# Allegro board K3.brd
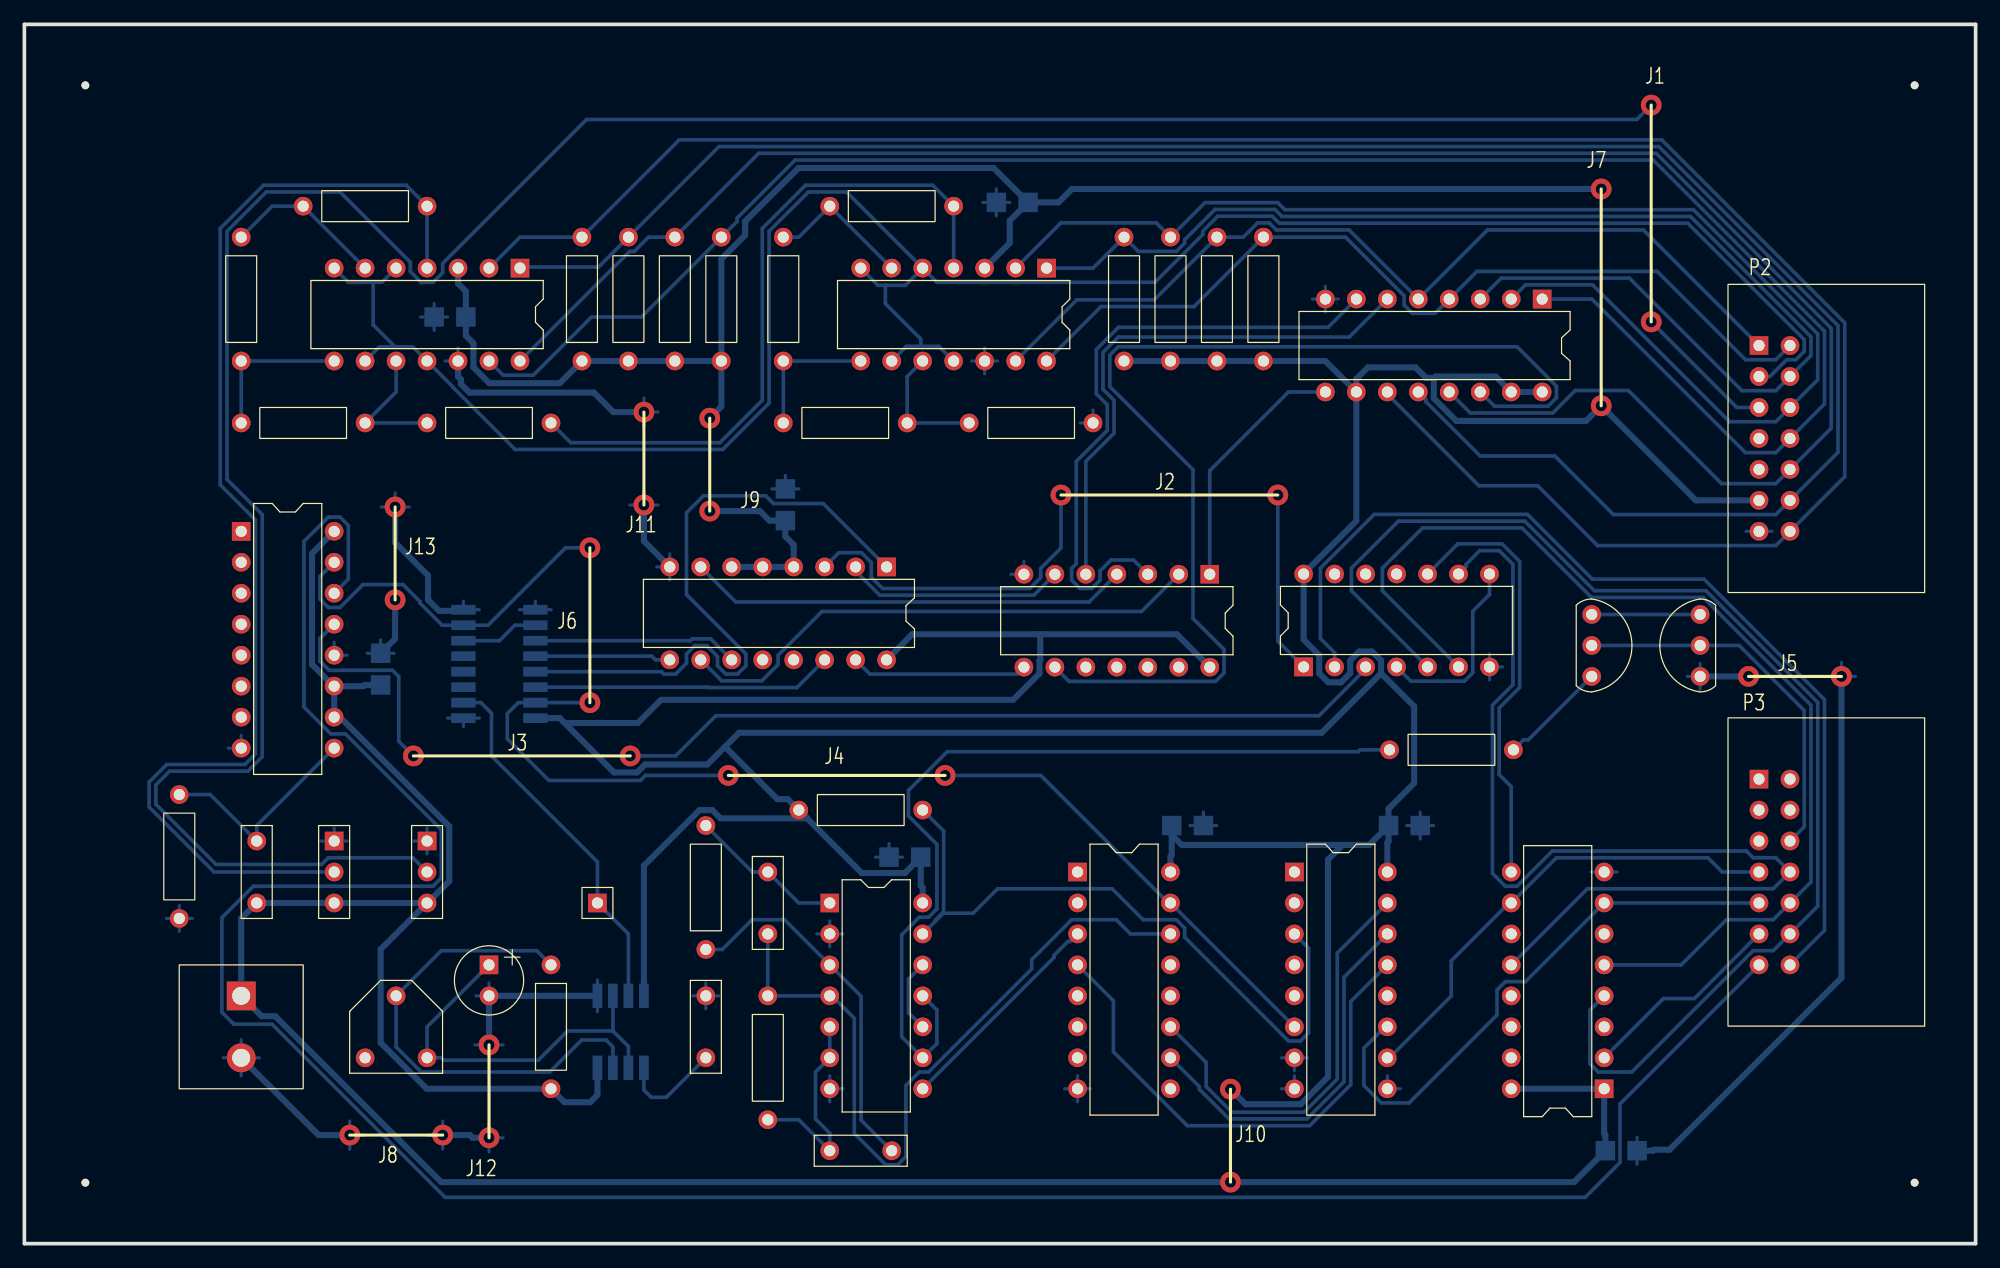
[diagram p0: board, top side]
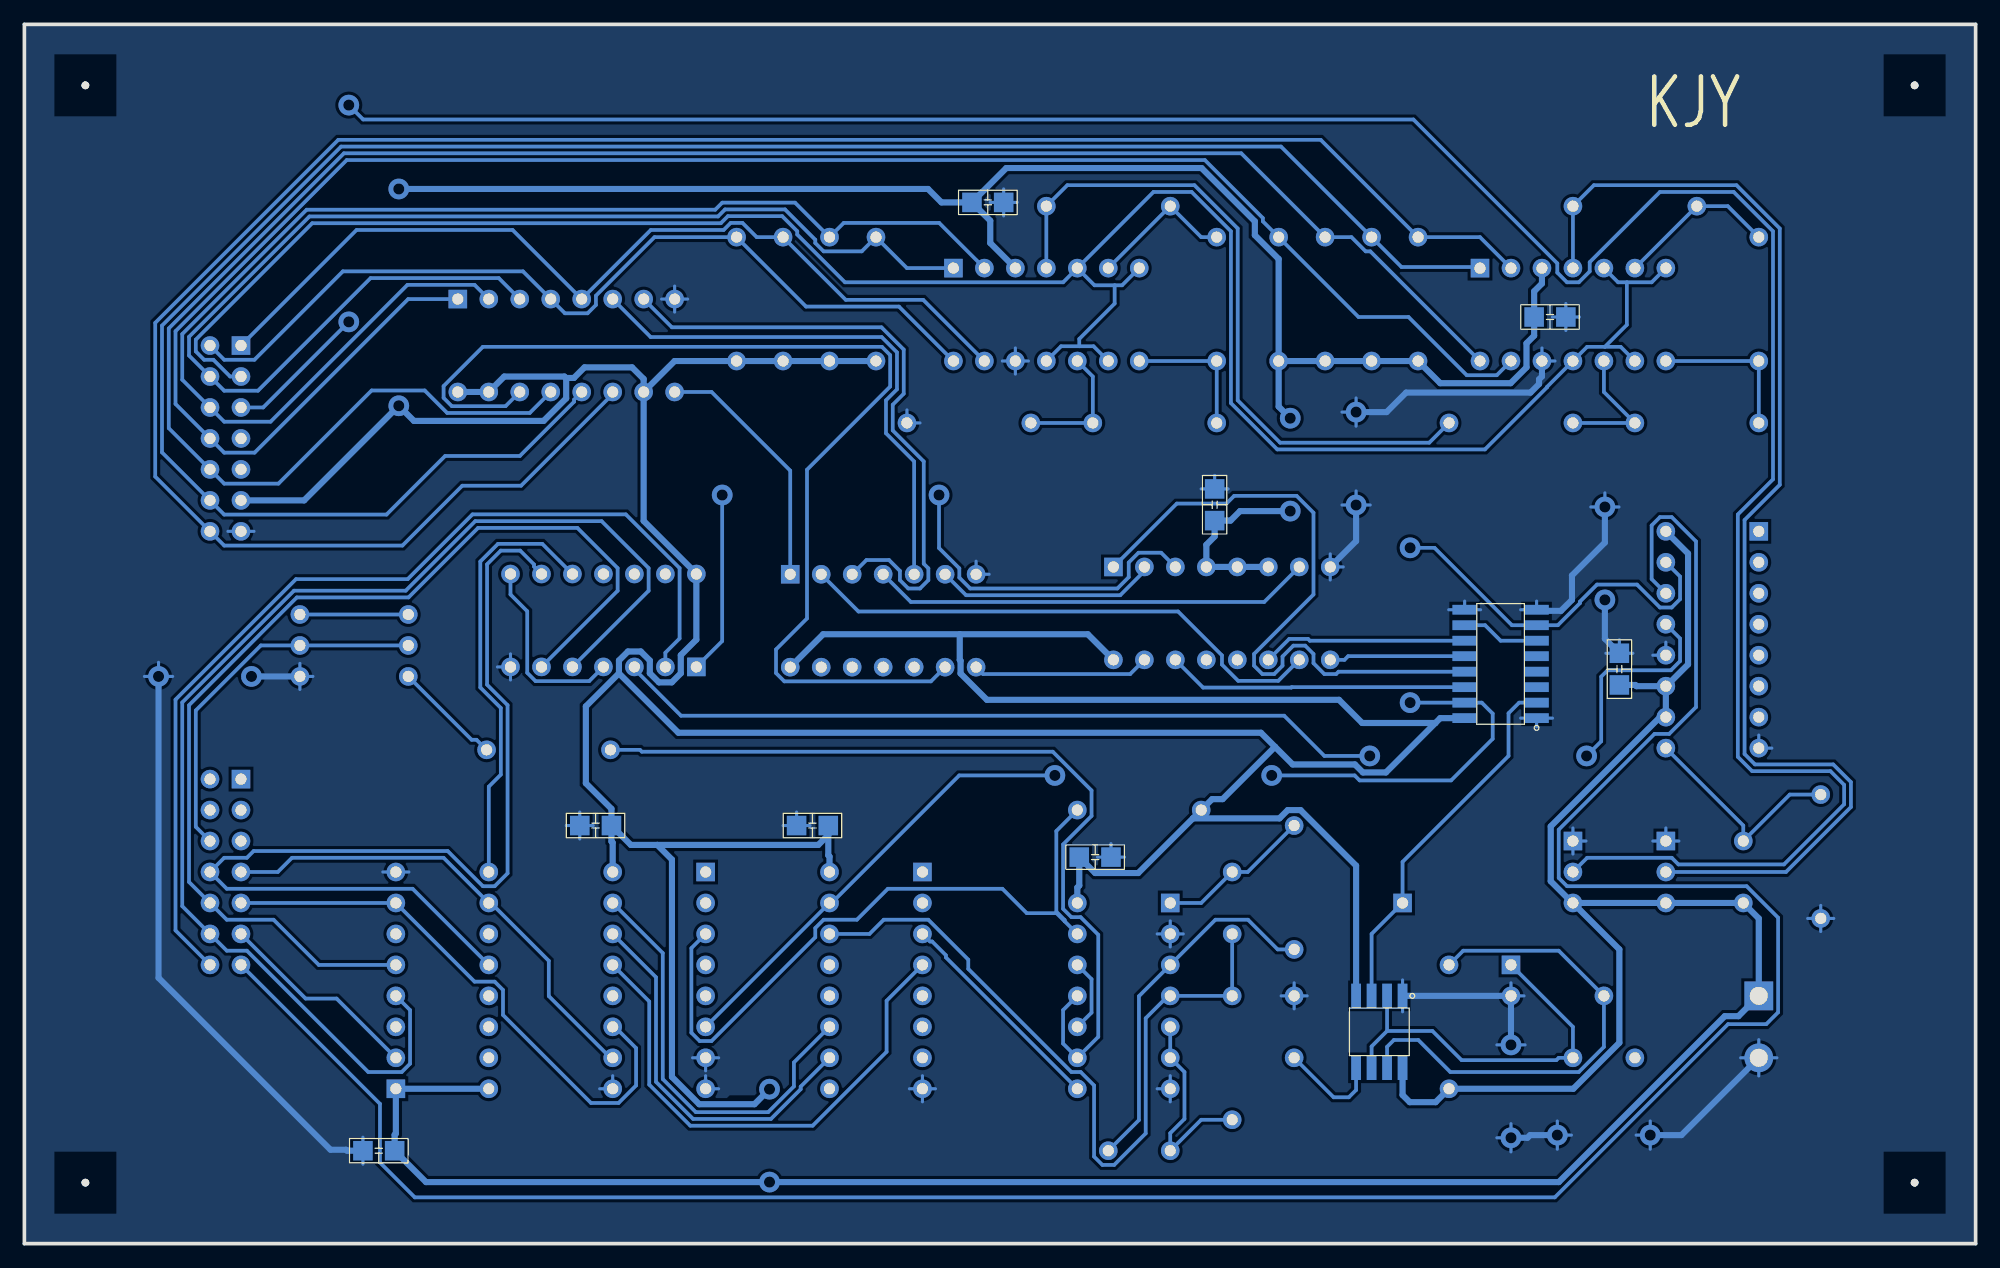
[diagram p1: board, bottom side, seen from below]

Outline 160 x 100 mm; copper layers: TOP, BOTTOM. Coordinates in mm from the lower left corner of the outline.
Outline path: 0,100 0,0 160,0 160,100 0,100

## Design rules (mm)
nets with their own width: min track width 0.5; nets +5V GND

## Placement (name value [footprint] x y rotation side)
C1  10uF  [CAP196]  38.1 22.86 0 top
C2  0.1uF  [CAP300]  55.88 15.24 90 top
C3  0.1uF  [CAP300]  19.05 27.94 90 top
C4  0.01uF  [CAP300]  60.96 30.48 270 top
C5  0.01uF  [CAP300]  71.12 7.62 180 top
C6  0.1uF  [SMDCAP]  36.3 76 180 bottom
C7  0.1uF  [SMDCAP]  82.4 85.4 180 bottom
C8  0.1uF  [SMDCAP]  62.4 59.2 90 bottom
C9  0.1uF  [SMDCAP]  111.76 34.29 0 bottom
C10  0.1uF  [SMDCAP]  93.98 34.29 0 bottom
C11  0.1uF  [SMDCAP]  29.21 45.72 90 bottom
C12  0.1uF  [SMDCAP]  129.54 7.62 0 bottom
C13  0.1uF  [SMDCAP]  73.6 31.7 180 bottom
J1  -  [JUMPER6]  133.4 75.6 270 bottom
J2  -  [JUMPER6]  85 61.4 180 bottom
J3  -  [JUMPER6]  31.9 40 180 bottom
J4  -  [JUMPER6]  75.5 38.4 0 bottom
J5  -  [JUMPER2]  141.38 46.52 180 bottom
J6  -  [JUMPER4]  46.37 44.37 270 bottom
J7  -  [JUMPER6]  129.3 86.5 90 bottom
J8  -  [JUMPER2]  34.3 8.9 0 bottom
J9  -  [JUMPER2]  56.2 67.7 90 bottom
J10  -  [JUMPER2]  98.9 5.05 270 bottom
J11  -  [JUMPER2]  50.8 68.2 90 bottom
J12  -  [JUMPER2]  38.1 16.3 90 bottom
J13  -  [JUMPER2]  30.4 52.8 270 bottom
NOREF  -  [unnamed]  155 5 0 top
NOREF#2  -  [#2]  0 0 0 top
NOREF#3  -  [#2]  0 0 90 top
NOREF#4  -  [unnamed]  5 5 0 top
NOREF#5  -  [unnamed]  5 95 0 top
NOREF#6  -  [unnamed]  155 95 0 top
P1  CON2  [POWER2]  17.78 20.32 270 top
P2  CON14  [JUMPER14]  142.24 73.66 270 top
P3  CON14  [JUMPER14]  142.24 38.1 270 top
Q1  2SC1815  [TO92]  128.52 51.6 270 top
Q2  2SC1815  [TO92]  137.41 46.52 90 top
R1  10K  [RES400]  43.18 12.7 0 top
R2  10K  [RES400]  33.02 85.09 90 top
R3  10K  [RES400]  17.78 82.55 180 top
R4  10K  [RES400]  17.78 67.31 270 top
R5  10K  [RES400]  33.02 67.31 270 top
R6  10K  [RES400]  76.2 85.09 90 top
R7  10K  [RES400]  62.23 82.55 180 top
R8  10K  [RES400]  62.23 67.31 270 top
R9  100  [RES400]  77.47 67.31 270 top
R10  4.7K  [RES400]  45.72 72.39 0 top
R11  4.7K  [RES400]  49.53 72.39 0 top
R12  4.7K  [RES400]  53.34 72.39 0 top
R13  4.7K  [RES400]  57.15 72.39 0 top
R14  4.7K  [RES400]  93.98 72.39 0 top
R15  4.7K  [RES400]  90.17 72.39 0 top
R16  4.7K  [RES400]  101.6 72.39 0 top
R17  4.7K  [RES400]  97.79 72.39 0 top
R18  680K  [RES400]  12.7 36.83 180 top
R19  10K  [RES400]  55.88 34.29 180 top
R20  10K  [RES400]  60.96 20.32 180 top
R21  10K  [RES400]  63.5 35.56 270 top
R22  1K  [RES400]  122.1 40.5 90 top
TP1  TP  [JUMPER1]  46.99 27.94 0 top
U1  NE555  [SOP8]  46.99 20.32 270 bottom
U2  LM339  [DIP14_3]  40.64 80.01 270 top
U3  LM339  [DIP14_3]  83.82 80.01 270 top
U4  40147  [DIP16_3]  124.46 77.47 270 top
U5  4069  [DIP14_3]  97.2 54.9 270 top
U6  4518  [SOP16]  36 43.1 0 bottom
U7  4585  [DIP16_3]  70.7 55.5 270 top
U8  4027  [DIP16_3]  17.78 58.42 0 top
U9  4071  [DIP14_3]  104.9 47.3 90 top
U10  4001  [DIP14_3]  66.04 27.94 0 top
U11  4017  [DIP16_3]  86.36 30.48 0 top
U12  4051  [DIP16_3]  104.14 30.48 0 top
U13  4175  [DIP16_3]  129.54 12.7 180 top
VR1  1M  [RESADJ]  33.02 15.24 270 top
VR2  10K  [JUMPER3]  25.4 33.02 270 top
VR3  10K  [JUMPER3]  33.02 33.02 270 top

## Library data of the parts
C1 = Cap Pol
C2-C5 = Cap NP: Tolerance: ***; User Part Number: ***
C6-C13 = Cap TEXT
J1-J13 = JUMPER
P1 = CON2
P2 P3 = CON14: User Part Number: ***
Q1 Q2 = 2SC1815
R1-R22 = resistor: Tolerance: ***; User Part Number: ***
TP1 = TP: User Part Number: ***
U1 = NE555
U2 U3 = LM339: Tolerance: ***; User Part Number: ***
U4 = 40147: Tolerance: ***; User Part Number: ***
U5 = 4069: Tolerance: ***; User Part Number: ***
U6 = 4518
U7 = 4585: Tolerance: ***; User Part Number: ***
U8 = 4027: Tolerance: ***; User Part Number: ***
U9 = 4071: Tolerance: ***; User Part Number: ***
U10 = 4001: Tolerance: ***; User Part Number: ***
U11 = 4017: Tolerance: ***; User Part Number: ***
U12 = 4051: Tolerance: ***; User Part Number: ***
U13 = 4175: Tolerance: ***; User Part Number: ***
VR1 = VR1: Tolerance: ***; User Part Number: ***
VR2 VR3 = VR2: User Part Number: ***

## Footprints (pads in the part's own frame, mm; a bottom-side part is the same pattern mirrored in y, then rotated)
CAP196
  rect 1.524x1.524 hole 0.914: 1(0,0)
  round 1.524 hole 0.914: 2(0,-2.54)
CAP300
  round 1.524 hole 0.914: 1(0,0) 2(5.08,0)
DIP14_3
  rect 1.524x1.524 hole 0.914: 1(0,0)
  round 1.524 hole 0.914: 2(0,-2.54) 3(0,-5.08) 4(0,-7.62) 5(0,-10.16) 6(0,-12.7) 7(0,-15.24) 8(7.62,-15.24) 9(7.62,-12.7) 10(7.62,-10.16) 11(7.62,-7.62) 12(7.62,-5.08) 13(7.62,-2.54) 14(7.62,0)
DIP16_3
  rect 1.524x1.524 hole 0.914: 1(0,0)
  round 1.524 hole 0.914: 2(0,-2.54) 3(0,-5.08) 4(0,-7.62) 5(0,-10.16) 6(0,-12.7) 7(0,-15.24) 8(0,-17.78) 9(7.62,-17.78) 10(7.62,-15.24) 11(7.62,-12.7) 12(7.62,-10.16) 13(7.62,-7.62) 14(7.62,-5.08) 15(7.62,-2.54) 16(7.62,0)
JUMPER1
  rect 1.524x1.524 hole 0.914: 1(0,0)
JUMPER3
  rect 1.524x1.524 hole 0.914: 1(0,0)
  round 1.524 hole 0.914: 2(2.54,0) 3(5.08,0)
JUMPER14
  rect 1.524x1.524 hole 0.914: 1(0,0)
  round 1.524 hole 0.914: 2(0,2.54) 3(2.54,0) 4(2.54,2.54) 5(5.08,0) 6(5.08,2.54) 7(7.62,0) 8(7.62,2.54) 9(10.16,0) 10(10.16,2.54) 11(12.7,0) 12(12.7,2.54) 13(15.24,0) 14(15.24,2.54)
POWER2
  rect 2.362x2.362 hole 1.473: 1(0,0)
  round 2.362 hole 1.473: 2(5.08,0)
RES400
  round 1.524 hole 0.914: 1(0,0) 2(0,10.16)
RESADJ
  round 1.524 hole 0.914: 1(0,0) 2(-5.08,-2.54) 3(0,-5.08)
SMDCAP
  rect 1.6x1.6 smd: 1(0.1,0) 2(2.7,0)
SOP8
  rect 2x0.8 smd: 1(0,0) 2(0,-1.27) 3(0,-2.54) 4(0,-3.81) 5(5.9,-3.81) 6(5.9,-2.54) 7(5.9,-1.27) 8(5.9,0)
SOP16
  rect 2x0.8 smd: 1(0,0) 2(0,-1.27) 3(0,-2.54) 4(0,-3.81) 5(0,-5.08) 6(0,-6.35) 7(0,-7.62) 8(0,-8.89) 9(5.9,-8.89) 10(5.9,-7.62) 11(5.9,-6.35) 12(5.9,-5.08) 13(5.9,-3.81) 14(5.9,-2.54) 15(5.9,-1.27) 16(5.9,0)
TO92
  round 1.524 hole 0.914: 1(0,0) 2(2.54,0) 3(5.08,0)
unnamed
  round 0.635 hole 3.175 unplated: (0,0)

## Nets
+5V: C3.1 C6.1 C7.1 C8.1 C9.1 C10.1 C11.1 C12.1 C13.1 P1.1 P2.11 R1.1 R10.1 R11.1 R12.1 R13.1 R14.1 R15.1 R16.1 R17.1 R21.1 U1.4(RST) U1.8(VCC) U2.3 U3.3 U4.10(I\9\) U4.15(I\0\) U4.16(VCC) U5.14 U6.16 U7.4(A>BIN) U7.5(A<BIN) U7.6(A=BIN) U7.16(VCC) U8.10(J) U8.11(K) U8.16 U9.14 U10.14 U11.16(VCC) U12.16(VCC) U13.1(R\S\T\) U13.16(VCC) VR2.3(A) VR3.3(A)
GND: C1.2 C2.2 C6.2 C7.2 C8.2 C9.2 C10.2 C11.2 C12.2 C13.2 P1.2 P2.13 Q2.1(B) R9.2 R18.2 U1.1(GND) U2.12 U3.12 U4.8(GND) U5.7 U6.1(CLK) U6.8 U6.9(CLK) U7.8(GND) U8.8 U8.12(RST) U9.7 U10.2(I1) U10.7 U11.8(GND) U12.7(VEE) U12.8(GND) U12.9(C) U13.8(GND) VR2.1(WIPER) VR3.1(WIPER)
AD0: P2.14 R10.2 U2.2(OUT) U4.11(I\1\)
AD1: P2.12 R11.2 U2.1(OUT) U4.12(I\2\)
AD2: P2.10 R12.2 U2.14(OUT) U4.13(I\3\)
AD3: P2.8 R13.2 U2.13(OUT) U4.1(I\4\)
AD4: P2.6 R14.2 U3.2(OUT) U4.2(I\5\)
AD5: P2.4 R15.2 U3.1(OUT) U4.3(I\6\)
AD6: P2.2 R16.2 U3.14(OUT) U4.4(I\7\)
AD7: P2.1 R17.2 U3.13(OUT) U4.5(I\8\)
CLK: TP1.1 U1.3(OUT) U6.2(EN)
MOTOR-GND: P3.6 Q1.2(C) Q2.2(C)
MR: U6.7(CLR) U6.15(CLR) U8.15(Q) U11.15(RST) U12.6(E\N\)
MR2: P3.13 U8.14(Q\)
SW1: P3.14 U9.2(I1)
SW2: P3.12 U9.5(I0) U13.4(D0)
SW3: P3.10 U9.6(I1) U13.5(D1)
SW4: P3.8 U9.9(I1) U13.12(D2)
SWLED1: P3.11 U13.2(Q0)
SWLED2: P3.9 U12.11(A) U13.7(Q1)
SWLED3: P3.7 U12.10(B) U13.10(Q2)
VR3: P2.5 VR3.2(B)
VR-LED: P2.3 U2.5(+IN) U2.7(+IN) U2.9(+IN) U2.11(+IN) U3.5(+IN) U3.7(+IN) U3.9(+IN) U3.11(+IN)
N01960: R2.2 R3.1 U2.6(-IN)
N01964: R2.1 U2.4(-IN) VR2.2(B)
N02001: R3.2 R4.1 U2.8(-IN)
N02088: R4.2 R5.1 U2.10(-IN)
N02162: R5.2 R6.1 U3.4(-IN)
N02236: R6.2 R7.1 U3.6(-IN)
N02310: R7.2 R8.1 U3.8(-IN)
N02384: R8.2 R9.1 U3.10(-IN)
N03342: U4.9(A\) U5.1(I)
N03346: U4.7(B\) U5.3(I)
N03353: U4.6(C\) U5.5(I)
N03365: U4.14(D\) U5.9(I)
N03377: U5.8(O) U7.15(A3)
N03391: U5.6(O) U7.2(A2)
N03403: U5.4(O) U7.7(A1)
N03415: U5.2(O) U7.10(A0)
N03439: U6.11(Q0) U7.11(B0)
N03441: U6.12(Q1) U7.9(B1)
N03443: U6.13(Q2) U7.1(B2)
N03445: U6.14(Q3) U7.14(B3)
N03459: U6.6(Q3) U6.10(EN)
N03623: R1.2 U1.7(DISC) VR1.2
N03677: C1.1 U1.2(TRIG) U1.6(THR) VR1.1
N03742: C2.1 U1.5(CV)
N03797: U7.3(A=BOUT) U9.1(I0)
N03822: U8.13(CLK) U9.3(O)
N03853: C3.2 R18.1 U8.9(SET)
N08438: C4.1 R19.1 U10.1(I0)
N08457: C4.2 R20.1 U10.4(O) U11.14(CLK)
N08473: C5.2 R20.2 U10.5(I0) U10.6(I1)
N08528: C5.1 R19.2 U10.3(O)
N08724: U11.11(9) U12.15(X2)
N08757: U11.10(4) U12.14(X1)
N08772: U11.4(2) U12.13(X0)
N08784: U10.8(I0) U11.3(0)
N08808: R21.2 U10.13(I1) U12.3(X)
N08837: U9.4(O) U9.8(I0)
N08841: U9.10(O) U13.9(CLK)
N09092: U10.10(O) U10.12(I0)
N09117: R22.2 U10.9(I1) U10.11(O)
N09203: Q1.3(E) R22.1
N09219: Q1.1(B) Q2.3(E)

Pads without a net: P2 7 9; P3 1 2 3 4 5; U5 10 11 12 13; U6 3 4 5; U7 12 13; U8 1 2 3 4 5 6 7; U9 11 12 13; U11 1 2 5 6 7 9 12 13; U12 1 2 4 5 12; U13 3 6 11 13 14 15; VR1 3

## Via types
v1: diameter 1.7, hole 0.91, TOP to BOTTOM, 26 vias

## Routing (per net, layer and track width the routed paths; a pad name or vN(x,y) marks a point on that pad's centre or on a via; arc(x,y) is an arc through that point)
+5V: length 746.2
  BOTTOM w0.5: U5.14 94.5,49.98 83.3,49.98 ; 57.45,40.75 58.6,41.9 106.37,41.9 111.25,46.77 ; 57.45,40.75 61.74,36.46 62.6,36.46 R21.1 64.18,34.88 ; 57.45,40.75 56,39.3 50.9,39.3 50.24,38.65 48.35,38.65 44.3,42.7 ; R13.1 57.15,80.76 59.1,82.71 59.1,83.85 63.47,88.22 79.48,88.22 C7.1 ; R13.1 57.15,68.65 v1(56.2,67.7) ; R13.1 R12.1 R11.1 R10.1 43.9,70.57 38.13,70.57 36.83,71.87 36.83,73.84 36.2,74.47 C6.1 36.2,78.1 35.56,78.74 U2.3 ; U8.16 23.58,56.6 23.58,47.51 25.37,45.72 U8.11 ; U4.10 106.68,72.39 R16.1 R17.1 R14.1 R15.1 ; U4.10 109.22,70.92 110.17,71.87 114.07,71.87 114.94,71 115.6,71 ; U4.10 109.22,59.27 104.9,54.95 U9.14 104.9,49.54 106.17,48.26 106.17,46.77 106.92,46.03 107.97,46.03 108.71,46.78 108.71,47.83 109.45,48.57 110.5,48.57 111.25,47.83 111.25,46.77 ; U12.16 111.76,32.89 111.86,32.99 C9.1 ; U1.4 50.8,31 55.35,35.56 56.41,35.56 57.08,34.88 64.18,34.88 ; C7.1 80.8,83.9 80.8,82.07 U3.3 ; C7.1 84.8,85.4 85.9,86.5 v1(129.3,86.5) ; 115.6,71 115.57,70.97 115.57,69.33 117.42,67.48 128.06,67.48 v1(129.3,68.72) 137.06,60.96 P2.11 ; 115.6,71 115.72,71.12 120.65,71.12 U4.15 U4.16 ; 94.08,33.52 94.08,31.85 93.98,31.75 U11.16 ; 94.08,33.52 C10.1 ; 94.08,33.52 94.9,32.7 108.1,32.7 ; U7.16 72.8,49.98 83.3,49.98 ; 111.25,46.77 113.96,44.06 113.96,37.76 111.86,35.66 C9.1 ; 44.3,42.7 50.3,42.7 52.2,44.6 81.07,44.6 83.23,46.76 83.23,47.8 83.3,47.87 83.3,49.98 ; 44.3,42.7 43.9,43.1 U6.16 ; VR3.3 33.05,27.94 34.84,29.73 34.84,34.22 25.88,43.18 U8.10 U8.11 ; VR3.3 29.21,24.13 29.21,16.47 32.99,12.7 R1.1 44.28,11.6 46.4,11.6 46.99,12.19 U1.8 ; VR3.3 VR2.3 C3.1 17.78,26.67 P1.1 19.45,18.65 20.57,18.65 34.18,5.05 v1(98.9,5.05) 127.07,5.05 C12.1 129.64,8.92 129.54,9.02 U13.1 U13.16 ; 64.18,34.88 68.66,30.4 72.2,30.4 C13.1 73.5,29.37 73.66,29.21 U10.14 ; U8.11 27.81,45.72 27.91,45.82 C11.1 ; 108.1,32.7 106.9,31.5 106.9,13.67 104.67,11.43 100.13,11.43 v1(98.9,12.67) ; 108.1,32.7 110.27,32.7 C9.1 ; U7.6 U7.5 U7.4 63.08,57.32 62.4,58 C8.1 61.1,59.3 60.32,60.08 v1(56.2,60.08)
GND: length 263.9
  BOTTOM w0.254: v1(34.3,8.9) 34.3,10.06 ; v1(34.3,8.9) 34.3,7.74 ; v1(34.3,8.9) 33.14,8.9 ; C11.2 30.32,48.42 ; C11.2 29.21,49.53 ; C11.2 28.1,48.42 ; 79.7,84.29 C7.2 ; C7.2 80.81,85.4 ; C7.2 78.59,85.4 ; C7.2 79.7,86.51 ; C10.2 97.79,34.29 ; C10.2 95.57,34.29 ; C10.2 96.68,35.4 ; U6.8 37.31,51.99 ; U6.8 34.69,51.99 ; U6.8 36,52.7 ; 52.92,54.43 U7.8 ; U7.8 52.92,56.57 ; U7.8 51.85,55.5 ; v1(50.8,68.2) 50.8,69.36 ; v1(50.8,68.2) 51.96,68.2 ; v1(50.8,68.2) 50.8,67.04 ; U3.12 78.74,73.46 ; U3.12 79.81,72.39 ; U3.12 78.74,71.32 ; U3.12 77.67,72.39 ; C13.2 72.01,31.7 ; C13.2 69.79,31.7 ; C13.2 70.9,32.81 ; C6.2 34.71,76 ; C6.2 33.6,74.89 ; C6.2 32.49,76 ; C6.2 33.6,77.11 ; 35.56,73.46 U2.12 34.49,72.39 ; 61.29,61.9 C8.2 ; C8.2 63.51,61.9 ; C8.2 62.4,63.01 ; C9.2 114.46,35.4 ; C9.2 113.35,34.29 ; C9.2 115.57,34.29 ; C9.2 114.46,33.18 ; U10.2 67.11,25.4 ; U10.2 66.04,24.33 ; U10.2 64.97,25.4 ; U10.2 66.04,26.47 ; 49.64,60.58 v1(50.8,60.58) ; v1(50.8,60.58) 50.8,61.74 ; v1(50.8,60.58) 51.96,60.58 ; 55.88,19.25 C2.2 ; C2.2 54.81,20.32 ; C2.2 55.88,21.39 ; C2.2 56.95,20.32 ; 37.03,20.32 C1.2 38.1,21.39 ; 31.95,33.02 VR3.1 ; VR3.1 33.02,34.09 ; VR3.1 33.02,31.95 ; v1(26.68,8.9) 26.68,10.06 ; v1(26.68,8.9) 27.84,8.9 ; v1(26.68,8.9) 26.68,7.74 ; v1(149,46.52) 150.16,46.52 ; v1(149,46.52) 149,47.68 ; v1(149,46.52) 147.84,46.52 ; 137.41,45.45 Q2.1 ; Q2.1 137.41,47.59 ; Q2.1 136.34,46.52 ; 38.1,7.52 v1(38.1,8.68) ; v1(38.1,8.68) 38.1,9.84 ; v1(38.1,8.68) 39.26,8.68 ; 104.14,13.77 U12.8 103.07,12.7 ; 87.63,68.38 R9.2 86.56,67.31 ; 16.71,40.64 U8.8 17.78,41.71 ; 24.33,33.02 VR2.1 ; VR2.1 26.47,33.02 ; VR2.1 25.4,34.09 ; 36.94,16.3 v1(38.1,16.3) 39.26,16.3 ; U4.8 107.75,77.47 ; U4.8 106.68,76.4 ; U4.8 106.68,78.54 ; U4.8 105.61,77.47 ; 25.4,49.33 U8.12 26.47,48.26 ; R18.2 13.77,26.67 ; R18.2 12.7,25.6 ; R18.2 11.63,26.67 ; R18.2 12.7,27.74 ; 120.14,46.23 U9.7 ; U9.7 121.21,47.3 ; U9.7 120.14,48.37 ; 132.24,8.73 C12.2 132.24,6.51 ; 36,42.39 U6.1 ; U6.1 34.69,43.1 ; U6.1 37.31,43.1 ; 128.47,30.48 U13.8 130.61,30.48 ; 111.76,13.77 U12.9 112.83,12.7 ; 46.99,19.01 U1.1 46.99,21.63 ; 86.36,11.63 U11.8 ; U11.8 87.43,12.7 ; U11.8 86.36,13.77 ; U11.8 85.29,12.7 ; 29.24,60.42 v1(30.4,60.42) ; v1(30.4,60.42) 30.4,61.58 ; v1(30.4,60.42) 31.56,60.42 ; 40.59,51.99 U6.9 ; U6.9 43.21,51.99 ; U6.9 41.9,52.7 ; P1.2 17.78,16.73 ; P1.2 16.29,15.24 ; P1.2 19.27,15.24 ; P1.2 17.78,13.75 ; 81.96,55.97 U5.7 80.89,54.9 ; 66.04,11.63 U10.7 ; U10.7 67.11,12.7 ; U10.7 66.04,13.77 ; 141.17,58.42 P2.13 143.31,58.42 ; U12.7 105.21,15.24 ; U12.7 103.07,15.24 ; U12.7 104.14,14.17
  BOTTOM w0.5: P1.2 24.12,8.9 v1(26.68,8.9) ; U1.1 C1.2 v1(38.1,16.3) ; v1(30.4,60.42) 30.4,57.5 33.1,54.8 33.1,52.8 34,51.9 35.91,51.9 U6.8 ; v1(50.8,68.2) 48.3,68.2 46.7,69.8 36.5,69.8 35.8,70.5 35.8,70.88 35.56,71.12 U2.12 ; v1(34.3,8.9) 36.53,8.9 36.75,8.68 v1(38.1,8.68) ; U7.8 50.8,57.62 v1(50.8,60.58) ; C11.2 30.4,49.61 v1(30.4,52.8) ; v1(141.38,46.52) Q2.1 ; C12.2 133.54,7.62 133.62,7.7 134.9,7.7 149,21.8 v1(149,46.52)
AD0: length 179.5
  BOTTOM w0.3: U4.11 111.76,69.67 119.27,62.16 124.09,62.16 129,57.25 143.61,57.25 P2.14 149.27,62.91 149.27,75.52 134.26,90.53 53.7,90.53 R10.2 40.64,82.55 U2.2
AD1: length 169.5
  BOTTOM w0.3: U2.1 40.73,80.1 47.08,80.1 R11.2 56.96,89.98 134.03,89.98 148.72,75.29 148.72,64.9 P2.12 143.61,59.79 130.31,59.79 125.5,64.6 119.37,64.6 114.92,69.05 114.92,69.23 U4.12
AD2: length 166.6
  BOTTOM w0.3: U4.13 118.56,68.13 125.33,68.13 127.17,69.97 131.53,69.97 139.17,62.33 143.61,62.33 P2.10 148.16,66.88 148.16,75.06 133.8,89.43 60.22,89.43 R12.2 51.18,82.55 50.01,81.38 49.63,81.38 U2.14
AD3: length 159.3
  BOTTOM w0.3: U2.13 39.27,71.22 41.72,71.22 46.5,76 50.6,76 R13.2 58.45,83.85 58.45,84.12 63.2,88.87 133.57,88.87 147.61,74.83 147.61,68.87 P2.8 143.61,64.87 141.13,64.87 128.53,77.47 U4.1
AD4: length 108.9
  BOTTOM w0.3: U4.2 123.09,78.64 128.59,78.64 139.81,67.41 143.61,67.41 P2.6 147.05,70.85 147.05,74.6 136.86,84.8 103.35,84.8 102.77,85.38 96.81,85.38 R14.2 92.81,83.72 84.99,83.72 U3.2
AD5: length 104.5
  BOTTOM w0.3: U3.1 87.63,80.01 R15.2 91.34,81.38 94.46,81.38 95.15,82.07 95.15,82.34 97.63,84.82 102.54,84.82 103.12,84.25 136.63,84.25 146.5,74.37 146.5,72.84 P2.4 143.61,69.95 140.85,69.95 131.61,79.19 121.1,79.19 U4.3
AD6: length 73.1
  BOTTOM w0.3: P2.2 143.61,72.49 141.13,72.49 133.88,79.74 119.11,79.74 U4.4 115.67,76.3 113.82,76.3 113.13,76.99 113.13,77.75 108.33,82.55 R16.2 95.9,76.85 88.28,76.85 U3.14
AD7: length 74.5
  BOTTOM w0.3: U3.13 86.3,77.41 92.65,77.41 R17.2 99.95,82.55 101.12,83.72 102.08,83.72 102.66,83.14 108.63,83.14 U4.5 119.97,83.14 132.76,83.14 P2.1
CLK: length 30.5
  BOTTOM w0.3: U1.3 49.53,25.4 TP1.1 46.99,31.31 38.3,40 38.3,43.5 37.43,44.37 U6.2
MOTOR-GND: length 30.8
  BOTTOM w0.3: Q1.2 Q2.2 140.61,49.06 145.95,43.73 145.95,34.19 P3.6
MR: length 96.9
  BOTTOM w0.3: U8.15 24.23,54.71 24.23,52.86 24.92,52.17 25.88,52.17 27.76,54.05 31.05,54.05 32.45,52.65 32.45,52.53 34.26,50.72 U6.7 38.02,50.72 44.37,57.07 v1(46.37,57.07) ; v1(46.37,44.37) U6.15 40.5,44.37 39.6,43.47 39.6,41.4 43.01,37.99 50.51,37.99 50.92,38.4 v1(57.72,38.4) ; U12.6 U11.15 93.8,27.94 83.34,38.4 v1(75.5,38.4)
MR2: length 213.9
  BOTTOM w0.3: P3.13 130.84,11.46 130.84,6.65 127.98,3.79 34.51,3.79 20.3,18 17.17,18 16.2,18.97 16.2,26.73 18.77,29.31 33.5,29.31 34.19,30 34.19,33.95 26.33,41.81 25.12,41.81 22.93,44.01 22.93,57.59 24.92,59.59 25.88,59.59 26.57,58.9 26.57,54.51 U8.14
SW1: length 81
  BOTTOM w0.3: U9.2 107.44,48.47 106.27,49.63 106.27,55.4 110.68,59.81 123.26,59.81 128.57,54.5 137.73,54.5 147.61,44.62 147.61,25.69 P3.14
SW2: length 104
  BOTTOM w0.3: U9.5 108.81,53.55 108.81,55.4 112.67,59.26 123.03,59.26 128.73,53.55 137.89,53.55 147.05,44.39 147.05,27.67 P3.12 143.41,24.03 141.76,24.03 131.8,14.07 129.06,14.07 128.37,14.76 128.37,19.15 U13.4
SW3: length 87.5
  BOTTOM w0.3: U9.6 111.35,53.55 111.35,55.4 114.65,58.7 122.8,58.7 128.5,53 137.66,53 146.5,44.16 146.5,29.66 P3.10 143.41,26.57 139.57,26.57 135.86,22.86 U13.5
SW4: length 84.6
  BOTTOM w0.3: U9.9 118.21,55.53 118.21,55.71 119.34,56.84 120.94,56.84 122.06,55.72 122.06,45.84 120.38,44.16 120.38,30.37 121.44,29.31 122.4,29.31 125.29,32.2 141.2,32.2 141.75,31.65 143.61,31.65 P3.8 143.41,29.11 128.17,29.11 U13.12
SWLED1: length 16.9
  BOTTOM w0.3: P3.11 136.94,20.1 134.4,20.1 U13.2
SWLED2: length 46.7
  BOTTOM w0.3: P3.9 U13.7 123.09,21.49 121.44,21.49 120.75,20.8 120.75,18.75 113.53,11.53 111.28,11.53 109.84,12.97 109.84,16.04 111.58,17.78 U12.11
SWLED3: length 39.5
  BOTTOM w0.3: P3.7 139.22,30.48 138.05,31.65 125.63,31.65 U13.10 121.74,27.94 117,23.2 117,20.3 111.94,15.24 U12.10
VR3: length 220.4
  BOTTOM w0.3: VR3.2 31.85,31.65 24.92,31.65 24.37,31.1 15.71,31.1 10.78,36.03 10.78,37.63 11.9,38.75 18.32,38.75 19.5,39.93 19.5,59.8 16.61,62.69 16.61,83.03 19.84,86.26 25.88,86.26 31.65,80.49 31.65,79.73 32.54,78.84 33.5,78.84 34.3,79.64 34.3,80.4 46.1,92.2 132.22,92.2 v1(133.4,93.38) ; v1(133.4,75.6) 140.42,68.58 P2.5
VR-LED: length 184.8
  BOTTOM w0.3: U3.5 67.41,86.26 64.29,86.26 61.06,83.03 61.06,68.94 57.26,65.14 40.24,65.14 35.15,70.23 35.15,70.27 U2.11 31.85,73.56 30.4,73.56 ; U3.5 74.83,78.84 92.71,78.84 96.62,82.76 96.62,83.03 97.86,84.27 102.31,84.27 102.89,83.69 136.4,83.69 145.95,74.14 145.95,73.18 145.26,72.49 144.5,72.49 143.13,71.12 P2.3 ; U3.5 72.25,78.6 70.6,78.6 ; 28.6,78.84 28.6,75.36 30.4,73.56 ; 28.6,78.84 26.57,78.84 U2.7 ; 28.6,78.84 29.31,78.84 U2.5 ; 70.6,78.6 69.99,78.6 U3.7 ; 70.6,78.6 70.6,77.1 73.5,74.2 73.5,73.6 ; 73.5,73.6 72.33,73.6 U3.9 ; 73.5,73.6 74.99,73.6 U3.11 ; 30.4,73.56 29.11,73.56 U2.9
N01960: length 13.3
  BOTTOM w0.3: R3.1 20.32,85.09 R2.2 U2.6
N01964: length 97.6
  BOTTOM w0.3: VR2.2 15.55,30.48 10.23,35.8 10.23,37.86 11.67,39.3 18.09,39.3 18.95,40.16 18.95,59.35 16.06,62.24 16.06,83.26 19.61,86.81 31.3,86.81 R2.1 U2.4
N02001: length 12.7
  BOTTOM w0.3: U2.8 R3.2 R4.1
N02088: length 11.2
  BOTTOM w0.3: U2.10 30.48,69.85 R4.2 R5.1
N02162: length 56.5
  BOTTOM w0.3: U3.4 R6.1 74.48,86.81 64.06,86.81 60.51,83.26 60.51,69.17 57.03,65.69 44.8,65.69 R5.2
N02236: length 12
  BOTTOM w0.3: R7.1 63.5,82.55 R6.2 U3.6
N02310: length 11.4
  BOTTOM w0.3: R8.1 R7.2 U3.8
N02384: length 10.7
  BOTTOM w0.3: R9.1 R8.2 72.39,71.12 U3.10
N03342: length 20.7
  BOTTOM w0.3: U5.1 97.2,63.4 103.65,69.85 U4.9
N03346: length 52
  BOTTOM w0.3: U5.3 90.95,56.07 89.1,56.07 88.21,55.17 88.21,54.42 87.52,53.73 86.56,53.73 85.87,54.42 85.87,55.38 86.25,55.76 86.25,64.15 88.8,66.7 88.8,68.8 87.9,69.7 87.9,73.33 89.72,75.15 106.9,75.15 U4.7
N03353: length 44.7
  BOTTOM w0.3: U5.5 87.04,64.16 89.35,66.47 89.35,69.17 88.45,70.07 88.45,73.1 89.7,74.35 108.64,74.35 U4.6
N03365: length 90.8
  BOTTOM w0.3: U5.9 85.67,46.11 97.68,46.11 98.37,46.8 98.37,48.73 95.83,51.27 95.83,63.47 89,70.3 89,72.87 89.69,73.56 122.4,73.56 125.63,70.33 125.63,69.37 124.94,68.68 120.55,68.68 U4.14
N03377: length 14.5
  BOTTOM w0.3: U7.15 69.33,46.71 81.39,46.71 U5.8
N03391: length 18.2
  BOTTOM w0.3: U7.2 68.16,55.16 70.14,53.18 82.78,53.18 U5.6
N03403: length 36.3
  BOTTOM w0.3: U7.7 58.33,52.63 87.31,52.63 U5.4
N03415: length 44
  BOTTOM w0.3: U7.10 57.18,46.16 60.47,46.16 61.8,47.49 61.8,48.25 65.4,51.85 91.61,51.85 U5.2
N03439: length 16.9
  BOTTOM w0.3: U7.11 56.28,49.6 54.75,49.6 54.6,49.45 U6.11
N03441: length 11.1
  BOTTOM w0.3: U7.9 51.75,47.88 51.45,48.18 U6.12
N03443: length 54.4
  BOTTOM w0.3: U7.1 65.5,60.7 61.43,60.7 60.79,61.33 55.68,61.33 54.29,59.95 54.29,53.24 59.17,48.36 59.17,47.4 58.48,46.71 57.52,46.71 56.83,47.4 56.83,48.16 55.94,49.05 54.98,49.05 54.29,48.36 54.29,47.6 53.4,46.71 52.44,46.71 52.24,46.91 U6.13
N03445: length 24.7
  BOTTOM w0.3: U6.14 56.08,45.64 56.11,45.61 63.35,45.61 U7.14
N03459: length 6.4
  BOTTOM w0.3: U6.6 38.95,49.45 40.22,50.72 U6.10
N03623: length 40.6
  BOTTOM w0.3: R1.2 42.01,24.03 34.19,24.03 VR1.2 30.48,16.13 32.54,14.07 43.07,14.07 45.7,16.7 47.7,16.7 48.26,16.14 U1.7
N03677: length 32.5
  BOTTOM w0.3: U1.6 49.53,16.17 48.26,17.44 ; U1.2 48.26,17.44 ; 48.26,17.44 44.54,17.44 42.15,15.05 34.38,15.05 34.19,15.24 VR1.1 33.02,17.78 C1.1
N03742: length 8.5
  BOTTOM w0.3: C2.1 52.64,12 51.4,12 50.8,12.6 U1.5
N03797: length 42.9
  BOTTOM w0.3: v1(85,61.4) 85,57.05 83.33,55.38 83.33,54.62 82.44,53.73 70.37,53.73 69.45,54.66 69.45,55.86 68.64,56.67 66.79,56.67 U7.3 ; U9.1 102.78,49.42 v1(102.78,61.4)
N03822: length 80.9
  BOTTOM w0.3: U9.3 109.98,47.12 106.16,43.3 56.7,43.3 53.4,40 v1(49.68,40) ; U8.13 24.23,49.63 24.23,47.78 24.99,47.02 30.18,47.02 30.7,46.5 30.7,41.2 v1(31.9,40)
N03853: length 18.2
  BOTTOM w0.3: R18.1 15.24,36.83 C3.2 19.05,34.29 U8.9
N08438: length 12.8
  BOTTOM w0.3: U10.1 63.5,27.94 C4.1 59.69,30.48 R19.1
N08457: length 62.1
  BOTTOM w0.3: U11.14 90.7,25.4 89.53,26.57 85.88,26.57 82.6,23.29 82.6,22.53 74.14,14.07 73.39,14.07 72.29,12.97 72.29,7.14 71.6,6.45 70.64,6.45 68.05,9.04 68.05,18.48 66.22,20.32 U10.4 R20.1 C4.2
N08473: length 17.3
  BOTTOM w0.3: U10.5 U10.6 64.87,14.07 64.87,10.23 66.04,9.06 C5.2 63.5,10.16 R20.2
N08528: length 30
  BOTTOM w0.3: R19.2 57.23,24.13 59.67,26.57 62.33,26.57 U10.3 68.61,20.29 68.61,10.13 C5.1
N08724: length 35
  BOTTOM w0.3: U11.11 96.9,14.86 96.9,12.89 99.01,10.78 104.94,10.78 107.65,13.5 107.65,23.83 U12.15
N08757: length 31.3
  BOTTOM w0.3: U11.10 96.35,12.87 96.35,12.66 98.78,10.23 105.17,10.23 108.21,13.27 108.21,21.85 U12.14
N08772: length 42.8
  BOTTOM w0.3: U12.13 108.76,19.86 108.76,13.04 105.4,9.67 95.36,9.67 89.3,15.73 89.3,19.92 U11.4
N08784: length 18.1
  BOTTOM w0.3: U10.8 84.44,23.48 84.44,23.66 85.56,24.78 85.74,24.78 U11.3
N08808: length 57.8
  BOTTOM w0.3: 74.7,26.44 75.36,27.1 77.8,27.1 79.81,29.11 89.19,29.11 91.73,26.57 94.46,26.57 95.15,25.88 95.15,25.12 103.66,16.61 104.62,16.61 105.31,17.3 105.31,24.23 U12.3 ; 74.7,26.44 74.7,26.55 75.38,27.23 75.38,33.84 R21.2 ; 74.7,26.44 U10.13
N08837: length 15.7
  BOTTOM w0.3: U9.4 113.69,46.13 118.08,46.13 118.77,46.82 118.77,51.87 120.14,53.24 U9.8
N08841: length 35.7
  BOTTOM w0.3: U13.9 121.92,37.48 120.93,38.47 120.93,43.93 122.61,45.61 122.61,55.95 121.17,57.39 117.53,57.39 U9.10
N09092: length 6
  BOTTOM w0.3: U10.12 72.49,21.69 72.49,18.95 U10.10
N09117: length 72.1
  BOTTOM w0.3: U10.11 74.83,19.15 74.83,16.41 U10.9 71.94,16.96 71.94,25.33 73.39,26.77 74.14,26.77 74.83,27.46 74.83,32.74 72.49,35.08 72.49,37.17 75.67,40.35 109.37,40.35 109.53,40.5 R22.2
N09203: length 8.9
  BOTTOM w0.3: R22.1 122.92,41.33 123.33,41.33 Q1.3
N09219: length 8.9
  BOTTOM w0.3: Q2.3 Q1.1

## Copper pours and planes (outline as drawn; the poured copper is in the pictures)
(no net) on BOTTOM: 0,0 0,100 160,100 160,0 ; 110 cut-outs

## Text on the board
Ref Des/Silkscreen Bottom: KJY
PLACE_BOUND_TOP: FIGURE | SIZE | 0.91 | 0.914 | 1.473 | DRILL CHART: TOP to BOTTOM | ALL UNITS ARE IN MILLIMETERS | PLATED | QTY | 26 | 264 | 1
